# Altium PCB square_board.PcbDoc
Units mm, origin at the board's own origin, x right, y up, seen from the top; angles counter-clockwise.
Board outline 30 x 30 mm, 2 copper layers (Top Layer, Bottom Layer); 2 components, 3 nets, 15 pads, 0 vias.
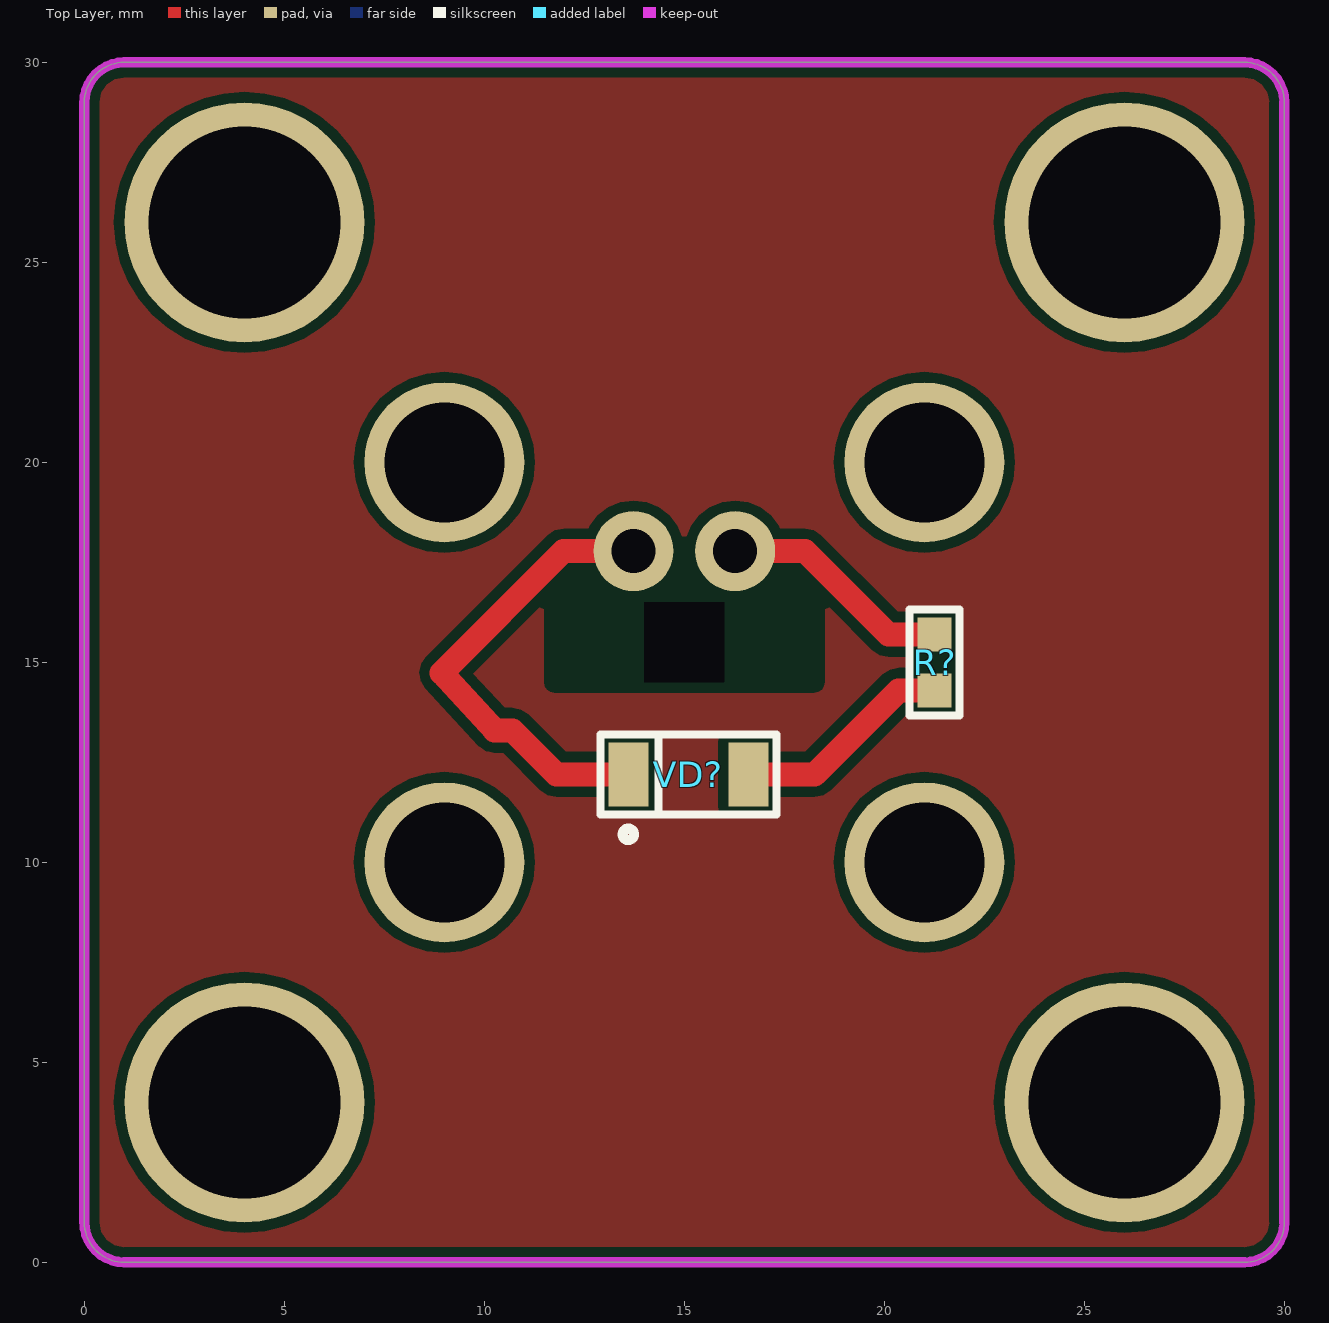
[diagram p0: Top Layer view]
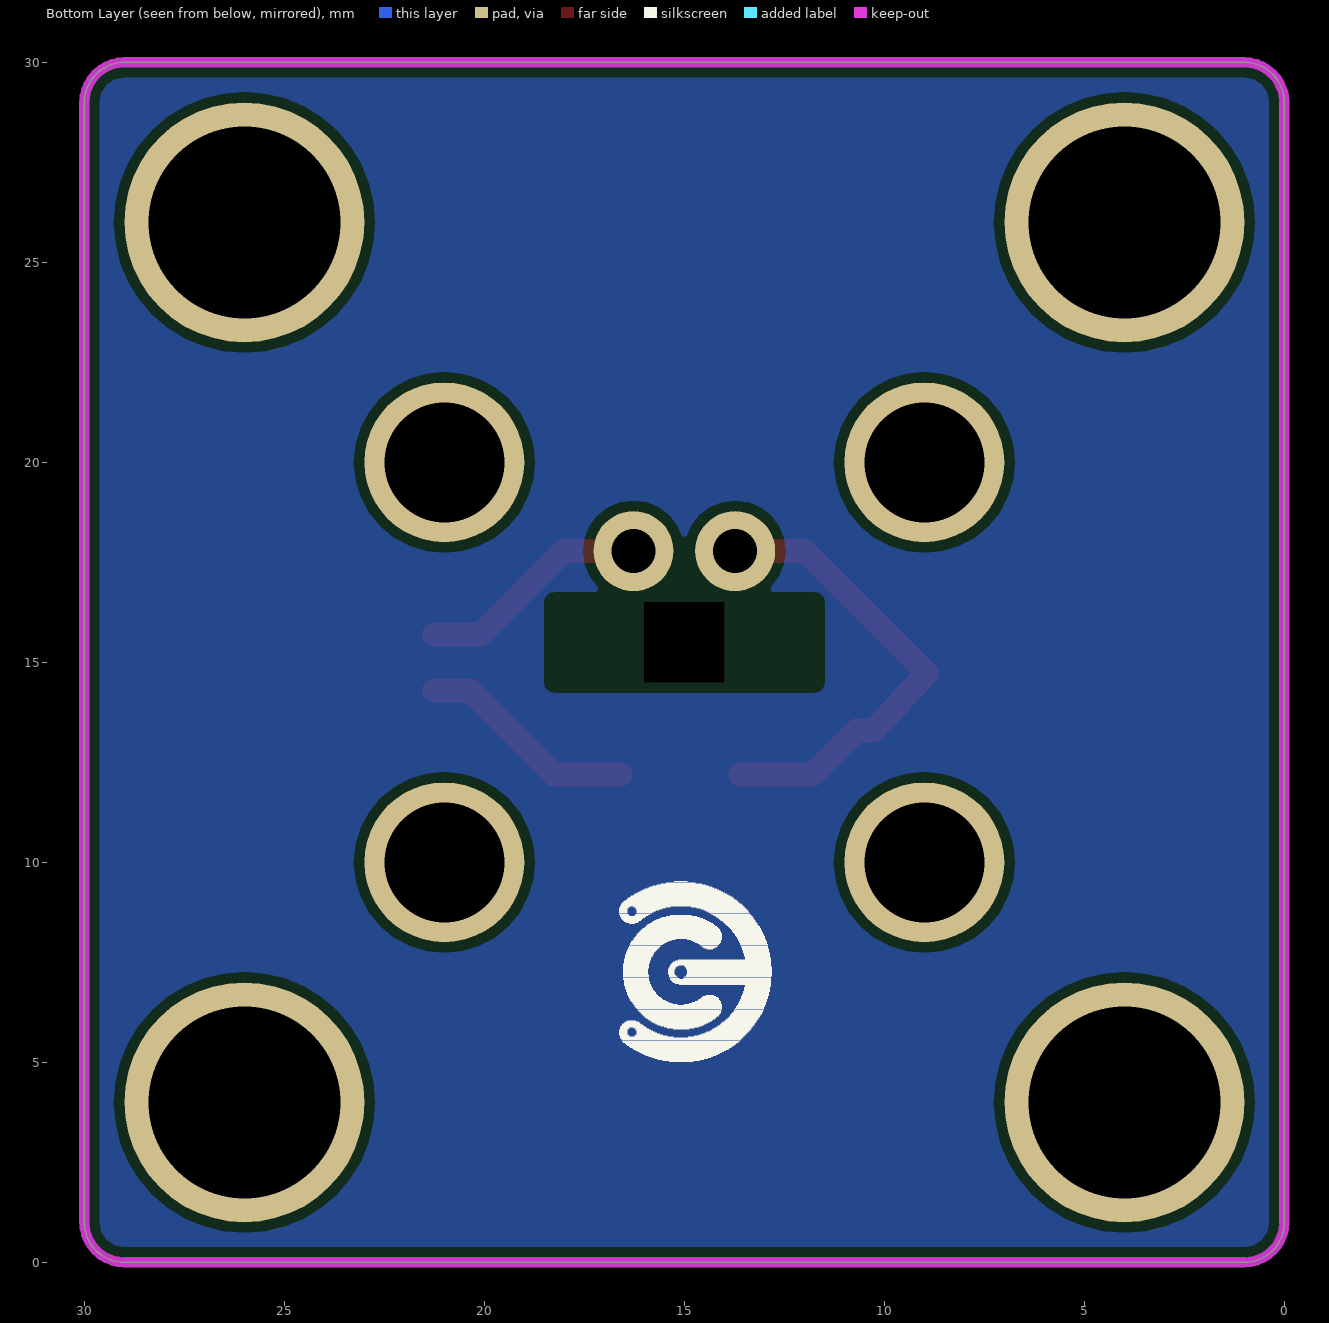
[diagram p1: Bottom Layer view, seen from below]

## Layer stack, top to bottom
Top Solder: solder mask 0.0102, Solder Resist, Dk 3.5
Top Layer: signal copper 0.0356
Dielectric 1: dielectric 0.32, FR-4, Dk 4.8
Bottom Layer: signal copper 0.0356
Bottom Solder: solder mask 0.0102, Solder Resist, Dk 3.5

## Board outline
1,0 cw(c1,1) 0,1 0,29 cw(c1,29) 1,30 29,30 cw(c29,29) 30,29 30,1 cw(c29,1) 29,0

## Design rules (kind name [scope] priority, off if disabled: settings)
Clearance [All] p1: gap=0.25 ignorepadtopadclearanceinfootprint=FALSE
PolygonConnect [All] p1: connectstyle=Relief reliefconductorwidth=0.254 reliefentries=4 polygonreliefangle="90 Angle" airgapwidth=0.254
RoutingVias [All] p1: holewidth=0.711 width=1.27 viastyle="Through Hole" minholewidth=0.711 minwidth=1.27 maxholewidth=0.711 maxwidth=1.27
SolderMaskExpansion [All] p1: expansion=0.102
Width [All] p1: maxlimit=10 minlimit=0.254 preferedwidth=0.254 minimp=50.000000 maximp=50.000000 favimp=50.000000
30 further rules are at their usual default settings.

## Components (designator, comment, footprint, x,y, rotation, side; value= is the part's Value field where it differs from the comment)
R? "Resistor film, 100R, ±5%, 0603, 0.1W, -55...+125°C" "RES: 0603" 21.26,15 r270 top value=100R
VD? "LED, *, *, *, -55...+150°C" "LED: 1206B" 15.1,12.2 r180 top

## Footprints (in the part's own frame and the unit in brackets; to place one, negate y for a bottom-side part, rotate by r counter-clockwise, add the part's x,y. Pads: shape width x height; smd on the part's side, far side on the other; paste and mask are expansions set on the pad)
"LED: 1206B" [mm]
  rect 1x1.6 smd: 1(-1.5,0) 2(1.5,0)
  silkscreen extent -2.2,-1 2.2,1, body extent -1.6,-0.8 1.6,0.8, height 1.1
"RES: 0603" [mm]
  rect 0.85x0.85 smd: 1(-0.7,0) 2(0.7,0)
  silkscreen extent -1.33,-0.63 1.33,0.63, body extent -0.8,-0.4 0.8,0.4, height 0.44

## Part data
R?: library part Resistor_0603, Manufacturer=Yageo, Package=0603, PartNumber=RC0603JR-07100RL, Power=0.1W, Temperature=-55...+125°C, Tolerance=±5%, TypeResistor="Resistor film", HelpURL=https://www.digikey.com/product-detail/en/yageo/RC0603JR-07100RL/311-100GRCT-ND/729644, ValueManufacturerPartNumber="Resistor film, 100R, ±5%, 0603, 0.1W, -55...+125°C"
VD?: library part LED_single, Color=GREEN, Temperature=-55...+150°C, TypeDiode=LED, ValueManufacturerPartNumber="LED, *, *, *, -55...+150°C"

## Free pads (board coordinates)
  round 2 hole 1.1: GND(13.73,17.78) VCC(16.27,17.78)
  round 6 hole 4.8: ""(4,4) ""(4,26) ""(26,4) ""(26,26)
  round 4 hole 3: ""(9,10) ""(9,20) ""(21,10) ""(21,20)
  rrect50% 0x0 hole 2 square: ""(15,15.5)

## Nets (pads, with @x,y where several pads share a name; then routed paths per layer and width w, separated by ;. In a path a pad name is that pad's centre, name@x,y a point inside that pad or via, vN(x,y) a via of type N, cw(c..) or ccw(c..) an arc to the next point about the centre after c; other vN are vias at no path point)
GND: pad.GND VD?.2 | length 11.8
  Top Layer w0.6: VD?.2 11.8,12.2 10.7,13.3 10.26,13.3 8.935,14.735 11.98,17.78 pad.GND
NetR?_2: R?.2 VD?.1 | length 5.5
  Top Layer w0.6: VD?.1 18.26,12.2 20.36,14.3 R?.2
VCC: pad.VCC R?.1 | length 5.9
  Top Layer w0.6: pad.VCC 18.02,17.78 20.1,15.7 R?.1

## Polygon pours and split planes (outlines as drawn)
no net on Bottom Layer "Top Layer-No Net1" (solid, pour order 2): 1,0 cw(c1,1) 0,1 0,29 cw(c1,29) 1,30 29,30 cw(c29,29) 30,29 30,1 cw(c29,1) 29,0
no net on Top Layer "Top Layer-No Net" (solid, pour order 0): 1,0 cw(c1,1) 0,1 0,29 cw(c1,29) 1,30 29,30 cw(c29,29) 30,29 30,1 cw(c29,1) 29,0

## Keep-outs
Keep-Out Layer:
  the board outline again, w0.254

## Silkscreen, mask and mechanical layers (free items; w line width, h text height)
Top Overlay:
  circle w0.254: c13.6,10.7 r0.141
Bottom Overlay:
  drawing of 376 lines, arcs and shapes, not listed